# EAGLE board chaprintesting (EAGLE 6.4)
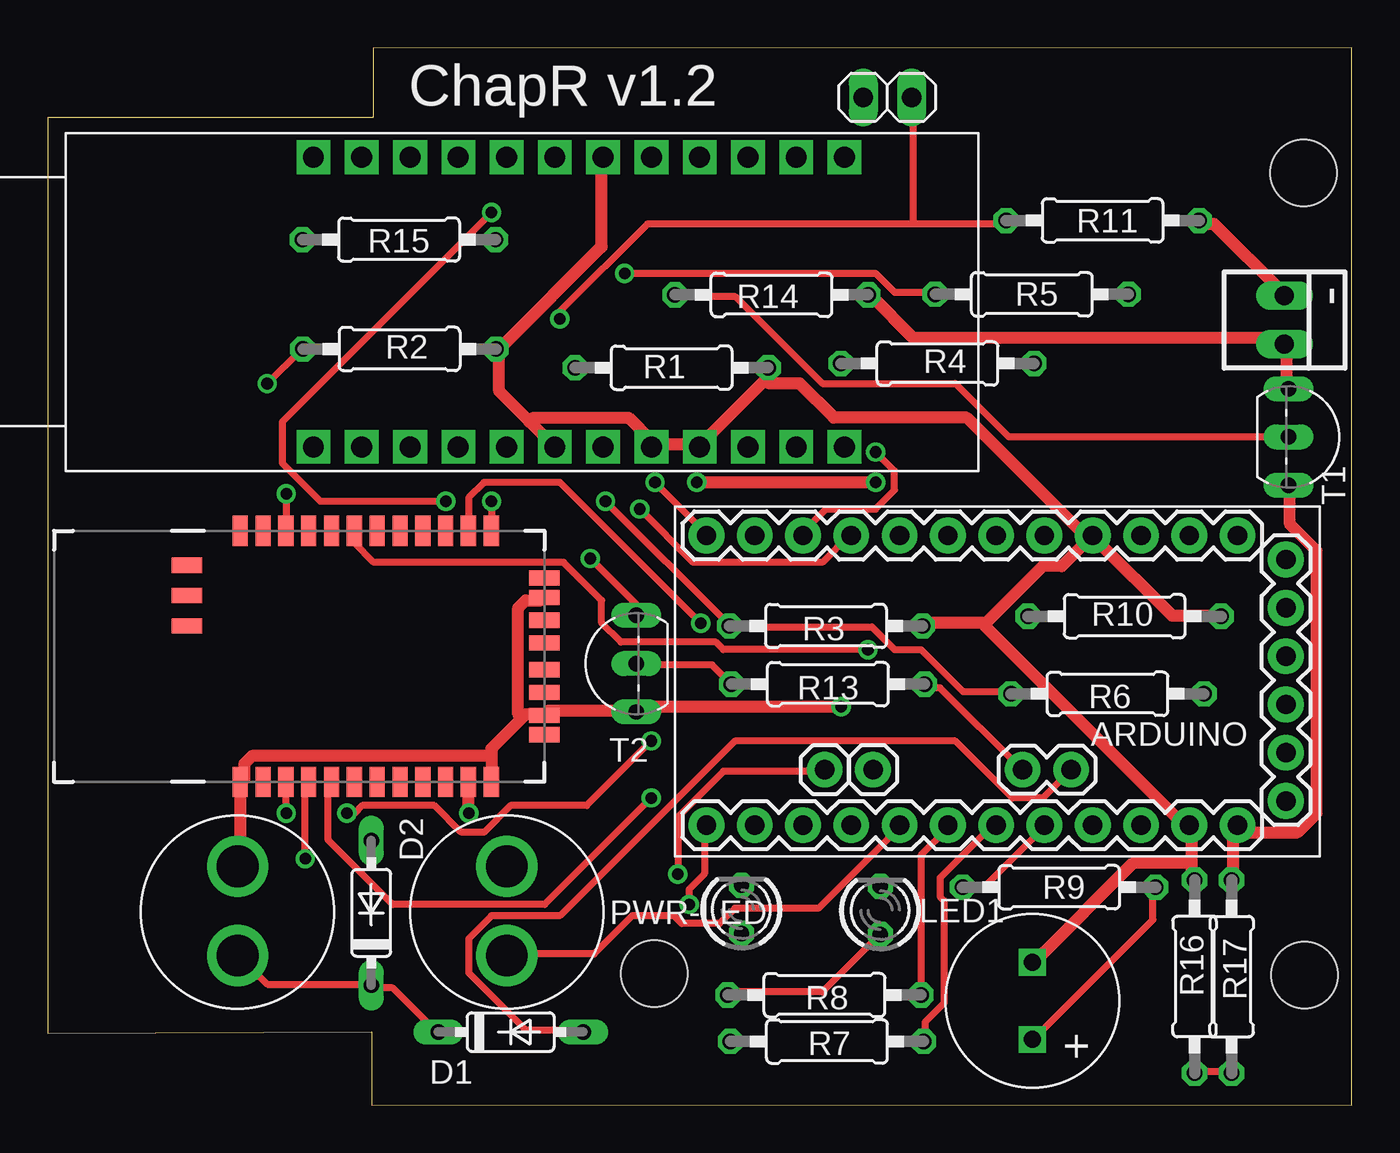
[diagram p0: board, top side]
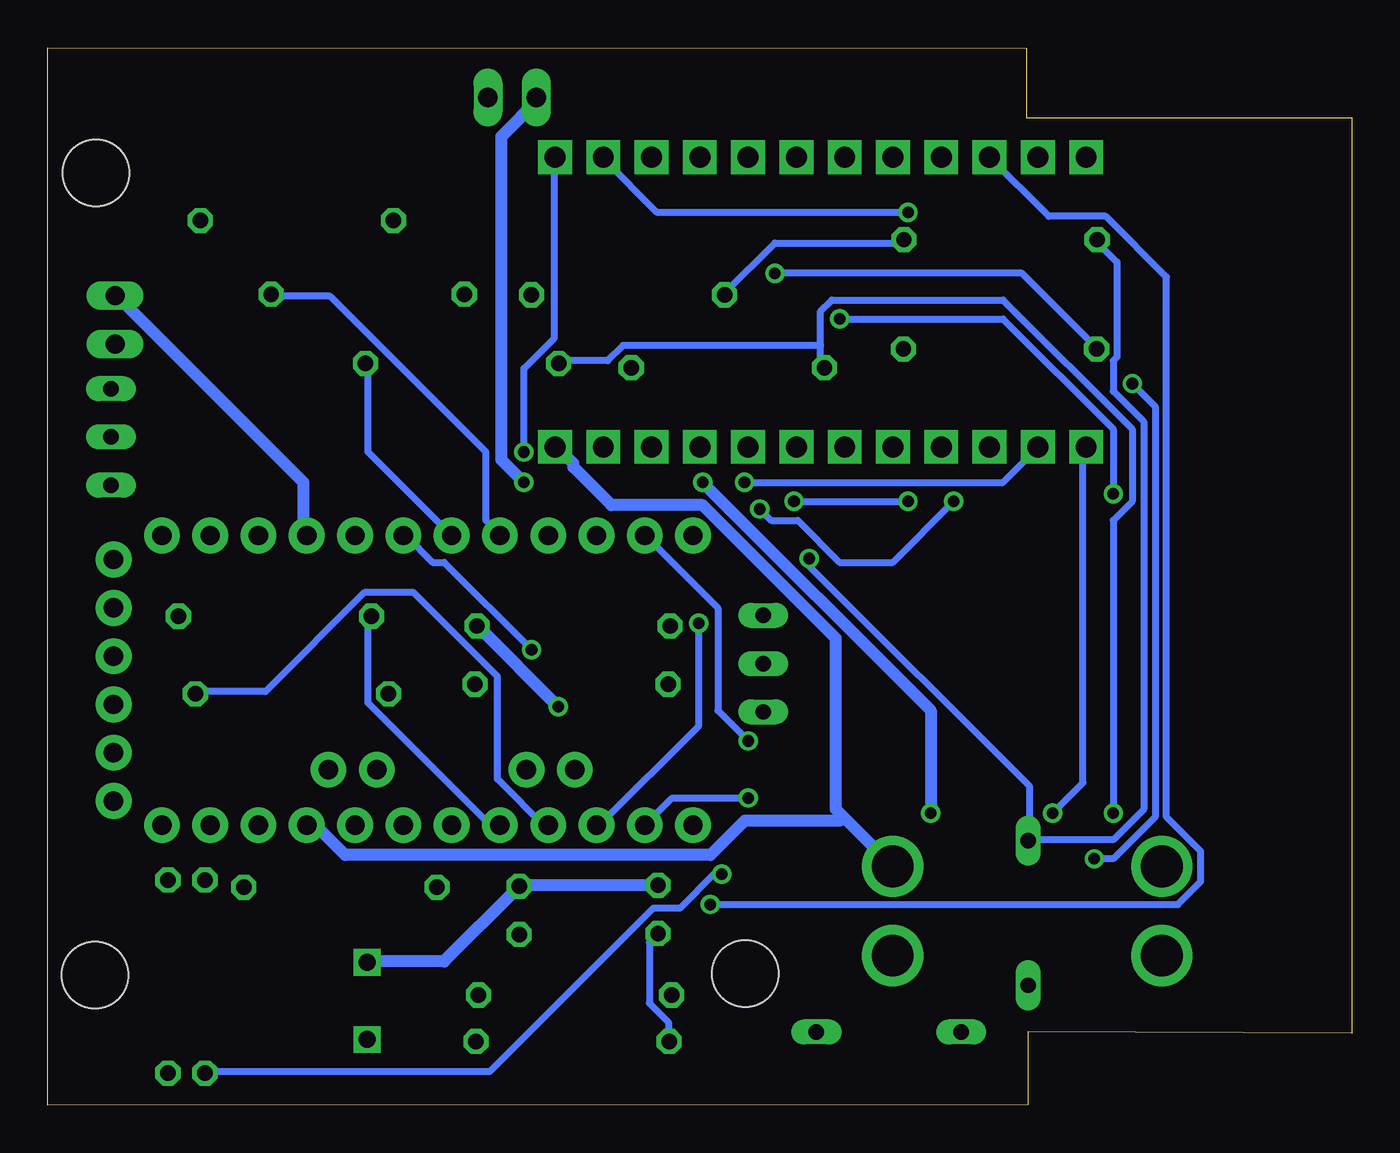
[diagram p1: board, bottom side, seen from below]

Size 68.62 x 55.65 mm. Coordinates in mm from the lower left corner, seen from the top.
Outline: 0,3.79 17.05,3.86 17.05,0.03 68.62,0 68.61,55.65 17.13,55.6 17.13,51.97 0,51.97 0,3.79
Copper layers (1*16): Top 0.035mm / dielectric 1.5mm / Bottom 0.035mm
Design rules "default *": minimum track width 10mil, minimum drill 24mil, track to track 8mil, track to pad 8mil, pad to pad 8mil, via to via 9mil, smd to smd 9mil, copper to edge 40mil, drill to drill 8mil, minimum pad ring 10mil, minimum via ring 8mil, stop-mask expansion 4mil, vias tented up to drill 0mil, thermal gap 10mil
Net classes: 0 default: width 0.381 mm; 1 GND: width 0.635 mm; 2 Supply: width 0.635 mm; 3 Main Supply: width 0.635 mm
Holes 3.5 mm at 66.08,49.05 66.11,6.84 31.92,6.94
tRestrict: area 24.4,28.8 to 26.9,31.3; area 24.3,16 to 26.8,18.5; area -0.7,15.9 to 9.5,31.2; area 30,4.9 to 34,8.9; area 64.1,4.8 to 68.1,8.8; area 64.2,47.1 to 68.2,51.1
bRestrict: area 24.4,28.8 to 26.9,31.3; area 24.3,16 to 26.8,18.5; area -0.7,16 to 9.5,31.3; area 64,4.8 to 68.2,8.8; area 64.2,47.2 to 68.3,51.1; area 29.9,5 to 34,8.9
vRestrict: area 9.5,17.4 to 25.5,29.4

## Footprints (pad centres in the part's own frame; a part is rotated, then mirrored left to right if it is on the bottom)
22-23-2021 = drill 1 long: 1 -1.27,0; 2 1.27,0
PROMINI = drill 1.016 pad 1.88: A0 6.35,-5.08; A1 6.35,-2.54; A2 6.35,0; A3 6.35,2.54; A4 3.429,1.397; A5 3.429,3.937; A6 3.429,-9.017; A7 3.429,-6.477; BLK -7.62,15.24; D2 -8.89,2.54; D3 -8.89,0; D4 -8.89,-2.54; D5 -8.89,-5.08; D6 -8.89,-7.62; D7 -8.89,-10.16; D8 -8.89,-12.7; D9 -8.89,-15.24; D10 6.35,-15.24; D11 6.35,-12.7; D12 6.35,-10.16; D13 6.35,-7.62; GND -8.89,5.08; GND2 6.35,10.16; GND3 -5.08,15.24; GRN 5.08,15.24; RAWV 6.35,12.7; RST -8.89,7.62; RST2 6.35,7.62; RXI -8.89,10.16; RXI2 0,15.24; TXO -8.89,12.7; TXO2 2.54,15.24; VCC 6.35,5.08; VCC2 -2.54,15.24
DO35-7 = drill 0.813 long: A 3.81,0; C -3.81,0
1X02 = drill 1.016 long: 1 -1.27,0; 2 1.27,0
LED3MM = drill 0.813 octagon: A -1.27,0; K 1.27,0
RN41 = smd 0.8 x 1.6: 1 -6.6,-6.6; 2 -5.4,-6.6; 3 -4.2,-6.6; 4 -3,-6.6; 5 -1.8,-6.6; 6 -0.6,-6.6; 7 0.6,-6.6; 8 1.8,-6.6; 9 3,-6.6; 10 4.2,-6.6; 11 5.4,-6.6; 12 6.6,-6.6; 13 6.6,6.6; 14 5.4,6.6; 15 4.2,6.6; 16 3,6.6; 17 1.8,6.6; 18 0.6,6.6; 19 -0.6,6.6; 20 -1.8,6.6; 21 -3,6.6; 22 -4.2,6.6; 23 -5.4,6.6; 24 -6.6,6.6 | smd 1.6 x 0.8: 25 -9.4,4.8; 26 -9.4,3.2; 27 -9.4,1.6; 28 9.4,3.1; 29 9.4,-3.1; 30 9.4,-4.122; 31 9.4,-1.9; 32 9.4,-0.7; 33 9.4,0.7; 34 9.4,1.9; 35 9.4,4.122
2-PIN-PUSHBUTTON = drill 2.2 pad 3.048: P$1 -1.778,0; P$2 2.921,0
0207/10 = drill 0.813 octagon: 1 -5.08,0; 2 5.08,0
TO92-EBC = drill 0.813 long: B 0,-1.27; C 2.54,-1.27; E -2.54,-1.27
V2DIP2 = drill 1.1 pad 1.778 square: P$1 40.97,1.27; P$2 38.43,1.27; P$3 35.89,1.27; P$4 33.35,1.27; P$5 30.81,1.27; P$6 28.27,1.27; P$7 25.73,1.27; P$8 23.19,1.27; P$9 20.65,1.27; P$10 18.11,1.27; P$11 15.57,1.27; P$12 13.03,1.27; P$13 40.97,16.51; P$14 38.43,16.51; P$15 35.89,16.51; P$16 33.35,16.51; P$17 30.81,16.51; P$18 28.27,16.51; P$19 25.73,16.51; P$20 23.19,16.51; P$21 20.65,16.51; P$22 18.11,16.51; P$23 15.57,16.51; P$24 13.03,16.51
SPEAKER = drill 0.9 square: + -2.032,0; - 2.032,0

## Placement (x,y rotation side)
-  9v power  [22-23-2021]  65.07,41.32 270 top
ARDUINO  PROMINI  [PROMINI]  49.9,21.09 270 top
D1  1N4148  [DO35-7]  24.36,3.86 0 top
D2  1N4148  [DO35-7]  17.03,10.12 90 top
JP1  [1X02]  44.18,53.03 180 top
LED1  [LED3MM]  43.8,10.26 90 top
M2  RN42 Module  [RN41]  16.74,23.62 0 top
PB1  PUSHBUTTON  [2-PIN-PUSHBUTTON]  24.16,10.8 270 top
PB2  BUTTON  [2-PIN-PUSHBUTTON]  9.99,10.8 270 top
PWR-LED  [LED3MM]  36.5,10.31 90 top
R1  19.1k  [0207/10]  32.83,38.8 180 top
R2  19.1k  [0207/10]  18.51,39.78 180 top
R3  19.1k  [0207/10]  40.95,25.22 180 top
R4  10k  [0207/10]  46.81,39.03 0 top
R5  10k  [0207/10]  51.77,42.67 0 top
R6  10k  [0207/10]  55.76,21.65 0 top
R7  470  [0207/10]  41,3.37 0 top
R8  470  [0207/10]  40.87,5.8 0 top
R9  100  [0207/10]  53.21,11.47 180 top
R10  10k  [0207/10]  56.65,25.73 180 top
R11  10k  [0207/10]  55.5,46.54 180 top
R13  10k  [0207/10]  41.05,22.16 0 top
R14  19.1k  [0207/10]  38.09,42.64 0 top
R15  1.5k  [0207/10]  18.49,45.54 180 top
R16  24K  [0207/10]  60.34,6.77 90 top
R17  24K  [0207/10]  62.28,6.77 270 top
T1  3906  [TO92-EBC]  66.56,35.16 270 top
T2  3904  [TO92-EBC]  29.7,23.24 90 top
U$1  V2DIP2  [V2DIP2]  0.96,33.37 0 top
U$2  SPEAKER  [SPEAKER]  51.8,5.5 90 top

## Library data of the parts
- = con-molex; MF: MOLEX; MPN: 22-23-2021; OC_FARNELL: 1462926; OC_NEWARK: 25C3832
ARDUINO PB1 PB2 U$1 U$2 = ChapR-Custom
D1 D2 = diode
JP1 = pinhead
LED1 PWR-LED = led
M2 = SparkFun-RF
R1-R11 R13-R17 = resistor
T1 T2 = transistor-neu-to92

## Nets
+3V3 [Supply]: JP1.2 M2.11
+5V [Supply]: ARDUINO.VCC PB1.P$1 U$1.P$1
+9V [Main Supply]: -.2 R14.2 T1.E
GND [GND]: -.1 ARDUINO.GND ARDUINO.GND2 LED1.K M2.1 M2.12 M2.28 M2.29 PB2.P$1 PWR-LED.K R1.1 R2.1 R3.1 R10.1 R11.1 R16.2 T2.E U$1.P$4 U$1.P$5 U$1.P$7 U$1.P$18 U$2.-
N$1: R14.1 R15.1 T1.B
N$2: ARDUINO.D10 U$1.P$22
N$3: ARDUINO.D13 R6.2
N$4: ARDUINO.D12 M2.14
N$5: ARDUINO.D11 M2.5
N$6: M2.3 R1.2 R4.1
N$7: M2.4 R2.2 R5.1
N$8: ARDUINO.D5 R5.2
N$9: M2.13 R3.2 R6.1
N$10: ARDUINO.D6 U$1.P$14
N$11: ARDUINO.D7 U$1.P$13
N$12: ARDUINO.D8 U$1.P$12
N$13: ARDUINO.D9 U$1.P$11
N$14: ARDUINO.D4 R4.2
N$15: ARDUINO.D3 M2.19
N$16: PWR-LED.A R7.1
N$17: LED1.A R8.1
N$18: ARDUINO.A2 R7.2
N$19: R9.1 U$2.+
N$20: ARDUINO.A1 R8.2
N$21: ARDUINO.A3 R9.2
N$22: JP1.1 M2.22 R11.2
N$23 [Main Supply]: ARDUINO.RAWV R17.1 T1.C
N$24: ARDUINO.A0 PB1.P$2 R10.2
N$25: D2.A R15.2 T2.C
N$26: R13.1 T2.B
N$27: D1.C D2.C PB2.P$2
N$28: U$1.P$24
N$29: ARDUINO.A5 D1.A
N$30: ARDUINO.A4 R13.2
N$31: ARDUINO.A6 R16.1 R17.2

## Tracks (layer width: path | path; a pad name or v marks a point on that pad's centre or on a via)
+3V3  (via drill 0.61)
  Top 0.635: v22.16,15.37 22.16,16.97 M2.11 | v43.55,32.77 v34.16,32.77
  Bottom 0.635: v22.16,15.37 22.16,20.77 v34.16,32.77 | v43.55,32.77 44.75,33.97 44.75,50.97 42.75,52.97 JP1.2
+5V
  Bottom 0.635: 26.76,15.17 24.35,12.77 PB1.P$1 | 26.76,15.17 27.16,15.57 27.16,24.57 34.16,31.57 38.95,31.57 40.95,33.57 40.95,33.77 41.75,34.57 U$1.P$1 | ARDUINO.VCC 54.95,14.57 54.35,14.57 52.95,13.17 33.75,13.17 31.95,14.97 26.95,14.97 26.76,15.17
+9V
  Top 0.635: R14.2 43.35,42.57 45.55,40.37 64.75,40.37 64.95,40.17 -.2 65.16,39.77 65.16,37.77 T1.E
GND  (via drill 0.61)
  Top 0.635: PB2.P$1 10.15,12.77 10.15,16.97 M2.1 10.36,17.17 10.36,17.97 10.76,18.37 23.35,18.37 | 23.35,18.37 23.35,18.77 24.95,20.37 | 23.35,18.37 23.35,17.17 M2.12 | 24.95,20.37 25.16,20.57 25.95,20.57 M2.29 26.35,20.77 30.95,20.77 T2.E 31.16,20.97 v41.75,20.97 | M2.28 25.95,26.57 25.16,26.57 24.76,26.17 24.76,20.57 24.95,20.37 | 60.16,12.77 60.16,14.57 ARDUINO.GND2 59.75,14.77 49.35,25.17 49.35,25.37 | 60.16,12.77 60.16,11.97 R16.2 | 60.16,12.77 57.16,12.77 51.95,7.57 U$2.- | 37.75,38.17 37.75,38.77 R1.1 | 37.75,38.17 34.35,34.77 U$1.P$4 34.16,34.77 31.95,34.77 U$1.P$5 31.75,34.97 30.55,36.17 25.55,36.17 25.35,35.97 | U$1.P$7 25.35,35.97 | 25.35,35.97 23.76,37.57 23.76,39.77 R2.1 23.95,39.97 29.16,45.17 29.16,49.77 U$1.P$18 | R11.1 60.75,46.37 61.35,46.37 64.95,42.77 -.1 | 49.35,25.37 46.16,25.37 R3.1 | 49.35,25.37 52.35,28.37 53.35,28.37 54.95,29.97 ARDUINO.GND | R10.1 61.55,25.77 59.16,25.77 55.16,29.77 ARDUINO.GND | 37.75,38.17 37.95,37.97 39.55,37.97 41.35,36.17 48.35,36.17 54.55,29.97 ARDUINO.GND
  Bottom 0.635: PWR-LED.K 36.55,11.57 43.75,11.57 LED1.K 43.95,11.37 47.75,7.57 51.75,7.57 U$2.- | -.1 64.95,42.57 55.16,32.77 55.16,30.17 ARDUINO.GND | v41.75,20.97 45.95,25.17 R3.1
N$1
  Top 0.381: T1.B 65.16,35.17 50.55,35.17 47.75,37.97 40.75,37.97 36.16,42.57 33.16,42.57 R14.1
  Bottom 0.381: R15.1 23.76,45.37 30.35,45.37 32.95,42.77 R14.1
N$2  (via drill 0.61)
  Top 0.381: v33.75,10.57 33.75,11.37 34.55,12.17 34.55,14.57 ARDUINO.D10
  Bottom 0.381: U$1.P$22 15.96,46.77 12.96,46.77 9.76,43.57 9.76,15.17 7.96,13.37 7.96,11.77 9.15,10.57 v33.75,10.57
N$3
  Bottom 0.381: R6.2 60.75,21.77 57.16,21.77 51.95,26.97 49.35,26.97 44.95,22.57 44.95,17.17 42.35,14.57 ARDUINO.D13
N$4  (via drill 0.61)
  Top 0.381: v34.35,25.37 26.95,32.77 22.95,32.77 22.16,31.97 22.16,30.37 M2.14
  Bottom 0.381: v34.35,25.37 34.35,19.97 39.55,14.77 ARDUINO.D12
N$5  (via drill 0.61)
  Top 0.381: v31.75,16.17 26.16,10.57 18.16,10.57 14.76,13.97 14.76,16.97 M2.5
  Bottom 0.381: v31.75,16.17 35.75,16.17 37.16,14.77 ARDUINO.D11
N$6  (via drill 0.61)
  Top 0.381: v12.55,15.37 12.55,16.97 M2.3
  Bottom 0.381: v12.55,15.37 12.55,30.77 11.55,31.77 11.55,35.57 18.35,42.37 27.35,42.37 27.95,41.77 27.95,39.97 | 27.95,39.97 27.95,39.17 27.76,38.97 R1.2 | 27.95,39.97 38.35,39.97 39.16,39.17 41.55,39.17 R4.1
N$7  (via drill 0.61)
  Top 0.381: v13.55,12.97 13.55,16.97 M2.4 | v11.55,37.97 13.36,39.77 R2.2 | v30.35,43.77 43.55,43.77 44.55,42.77 46.55,42.77 R5.1
  Bottom 0.381: v13.55,12.97 12.55,12.97 10.36,15.17 10.36,36.77 v11.55,37.97 | v30.35,43.77 17.35,43.77 13.55,39.97 R2.2
N$8
  Bottom 0.381: R5.2 56.75,42.57 53.75,42.57 45.55,34.37 45.55,30.77 44.95,30.17 ARDUINO.D5
N$9  (via drill 0.61)
  Top 0.381: v23.35,31.77 23.35,30.37 M2.13 | v29.35,31.77 35.75,25.37 R3.2 35.95,25.17 43.35,25.17 44.55,23.97 45.95,23.97 48.16,21.77 50.55,21.77 R6.1
  Bottom 0.381: v29.35,31.77 v23.35,31.77
N$10  (via drill 0.61)
  Top 0.381: v23.35,46.97 12.36,35.97 12.36,33.77 14.35,31.77 v20.95,31.77 | v31.16,31.37 33.95,28.57 40.75,28.57 42.16,29.97 ARDUINO.D6
  Bottom 0.381: v23.35,46.97 36.55,46.97 39.35,49.77 U$1.P$14 | v20.95,31.77 24.16,28.57 26.95,28.57 29.16,30.77 30.55,30.77 v31.16,31.37
N$11  (via drill 0.61)
  Top 0.381: v43.55,34.37 44.55,33.37 44.55,32.37 43.55,31.37 40.95,31.37 39.75,30.17 ARDUINO.D7
  Bottom 0.381: v43.55,34.37 43.55,38.77 41.95,40.37 41.95,49.77 U$1.P$13
N$12  (via drill 0.61)
  Top 0.381: v15.76,15.37 16.16,15.37 16.55,15.77 20.35,15.77 21.76,14.37 22.95,14.37 24.35,15.77 28.35,15.77 v31.75,19.17
  Bottom 0.381: v15.76,15.37 14.15,16.97 14.15,34.57 U$1.P$12 | v31.75,19.17 33.35,20.77 33.35,26.17 37.16,29.97 ARDUINO.D8
N$13  (via drill 0.61)
  Top 0.381: v31.95,32.77 34.55,30.17 ARDUINO.D9
  Bottom 0.381: v31.95,32.77 18.35,32.77 16.55,34.57 U$1.P$11
N$14
  Bottom 0.381: R4.2 51.75,38.97 51.75,34.37 47.55,30.17 ARDUINO.D4
N$15  (via drill 0.61)
  Top 0.381: v43.16,23.97 35.55,23.97 35.16,24.37 30.16,24.37 29.16,25.37 29.16,26.57 27.16,28.57 17.16,28.57 16.16,29.57 16.16,30.17 M2.19
  Bottom 0.381: v43.16,23.97 47.75,28.57 48.35,28.57 49.75,29.97 ARDUINO.D3
N$16
  Bottom 0.381: R7.1 35.95,3.37 35.95,4.37 36.95,5.37 36.95,8.57 36.55,8.97 PWR-LED.A
N$17
  Top 0.381: R8.1 35.95,5.97 40.75,5.97 43.75,8.97 LED1.A
N$18
  Top 0.381: R7.2 46.16,3.37 46.16,4.37 47.16,5.37 47.16,10.77 46.95,10.97 46.95,11.97 49.75,14.77 ARDUINO.A2
N$19
  Top 0.381: R9.1 58.16,11.37 58.16,9.77 51.95,3.57 U$2.+
N$20
  Top 0.381: R8.2 45.95,5.97 45.95,13.17 47.35,14.57 ARDUINO.A1
N$21
  Top 0.381: R9.2 48.16,11.57 49.35,11.57 52.35,14.57 ARDUINO.A3
N$22  (via drill 0.61)
  Top 0.381: v12.55,32.17 12.55,30.37 M2.22 | v26.95,41.37 26.95,41.77 31.55,46.37 45.55,46.37 | 45.55,46.37 50.35,46.37 R11.2 | 45.55,46.37 45.55,52.97 JP1.1
  Bottom 0.381: v12.55,32.17 12.55,35.57 18.35,41.37 v26.95,41.37
N$23
  Top 0.635: R17.1 62.36,11.97 62.36,14.37 62.55,14.57 ARDUINO.RAWV 62.75,14.37 65.75,14.37 66.75,15.37 66.75,29.17 65.36,30.57 65.36,32.57 T1.C
N$24
  Top 0.381: PB1.P$2 24.35,7.97 28.76,7.97 30.75,9.97 32.95,9.97 33.35,9.57 35.35,9.57 36.16,10.37 40.55,10.37 44.75,14.57 ARDUINO.A0
  Bottom 0.381: R10.2 51.75,25.57 51.75,21.17 45.35,14.77 44.95,14.77 ARDUINO.A0
N$25  (via drill 0.61)
  Top 0.381: v28.55,28.77 30.95,26.37 30.95,25.97 T2.C
  Bottom 0.381: R15.2 13.36,45.37 12.36,44.37 12.36,39.37 12.55,39.17 12.55,37.57 10.96,35.97 10.96,15.57 12.55,13.97 16.95,13.97 D2.A 16.95,14.17 16.95,16.77 28.55,28.37 v28.55,28.77
N$26
  Top 0.381: T2.B 31.16,23.17 34.95,23.17 35.95,22.17 R13.1
N$27
  Top 0.381: D1.C 20.35,3.97 18.16,6.17 17.16,6.17 D2.C 16.95,6.37 11.55,6.37 10.15,7.77 PB2.P$2
N$29
  Top 0.381: D1.A 28.16,3.97 25.16,3.97 22.16,6.97 22.16,8.77 23.35,9.97 26.95,9.97 36.16,19.17 47.75,19.17 50.75,16.17 52.35,16.17 53.75,17.57 ARDUINO.A5
N$30
  Top 0.381: R13.2 46.16,21.97 46.95,21.97 51.16,17.77 ARDUINO.A4
N$31  (via drill 0.61)
  Top 0.381: R16.1 60.35,1.77 62.16,1.77 R17.2 | v33.16,12.17 33.16,15.17 35.55,17.57 40.75,17.57 ARDUINO.A6
  Bottom 0.381: v33.16,12.17 33.55,12.17 35.35,10.37 36.75,10.37 45.35,1.77 60.16,1.77 R16.1

## Text on the board
tPlace: ChapR v1.2 | +
Reference: .26 inner support diam | .32 outer support diam | 2.4 max board width | 1.94 between outer supports edge